# Altium PCB PCB1.PcbDoc (part 2 of 2)
Units mm, origin at the board's own origin, x right, y up, seen from the top; angles counter-clockwise.
Board outline 51.6 x 51.6 mm, 4 copper layers (Top Layer, Internal Plane 1, Signal Layer 1, Bottom Layer), stack 0.98 mm thick; 99 components, 76 nets, 363 pads, 363 vias.
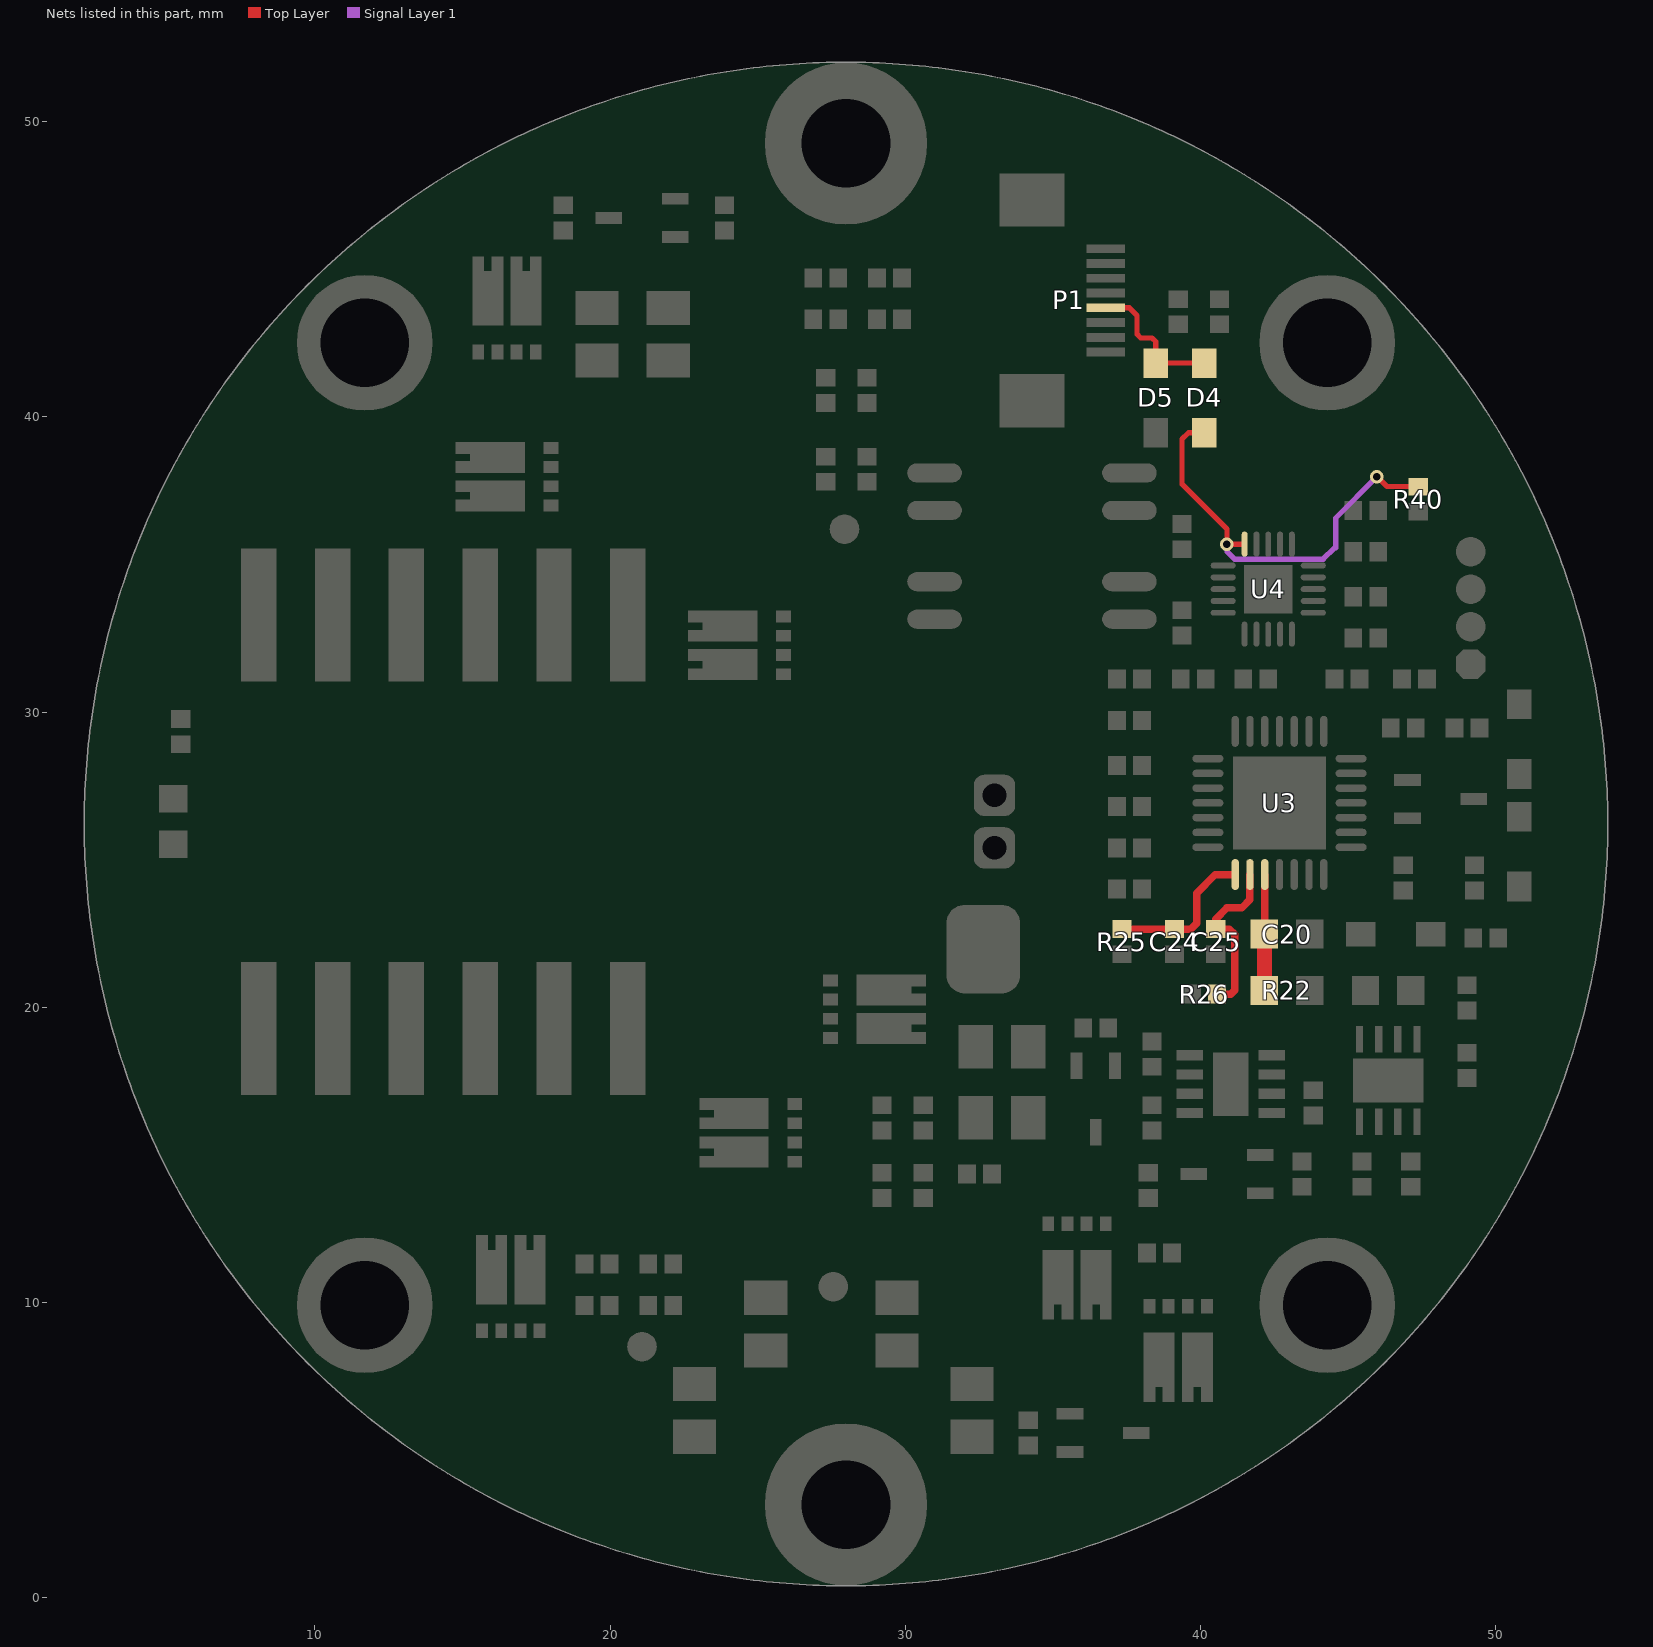
[diagram p4: the nets of this part, all layers, seen from the top]

## Via types
v1: diameter 0.457, hole 0.254, Top Layer to Bottom Layer, tented both sides, 363 vias

## Nets (pads, with @x,y where several pads share a name; then routed paths per layer and width w, separated by ;. In a path a pad name is that pad's centre, name@x,y a point inside that pad or via, vN(x,y) a via of type N, cw(c..) or ccw(c..) an arc to the next point about the centre after c; other vN are vias at no path point) (continued)
VC4: C24.2 R25.2 U3.15 | length 4.8
  Top Layer w0.254: 37.719,22.65 C24.2@39.116,22.65 39.668,22.65 39.87,22.852 39.87,23.868 40.501,24.499 U3.15@41.172,24.499
VC5: C25.2 R26.2 U3.16 | length 5.9
  Top Layer w0.254: R26.2@40.557,20.447 41.021,20.447 41.155,20.581 41.155,22.472 40.977,22.65 C25.2@40.513,22.65 40.513,22.987 40.894,23.368 41.402,23.368 41.672,23.638 U3.16@41.672,24.499
VDD: C20.2 R22.2 U3.17 | length 3.9
  Top Layer w0.254: C20.2@42.156,22.479 42.172,22.495 U3.17@42.172,24.499
  Top Layer w0.508: R22.2@42.156,20.574 C20.2@42.156,22.479
VINOK: D4.1 R40.1 U4.10 | length 14.4
  Top Layer w0.178: D4.1@40.132,39.46 39.587,39.46 39.37,39.243 39.37,37.719 40.894,36.195 v1(40.894,35.687) U4.10@41.491,35.688 U4.10@41.491,35.688 ; v1(45.974,37.973) 46.311,37.636 R40.1@47.371,37.636
  Signal Layer 1 w0.178: v1(40.894,35.687) 40.894,35.433 41.148,35.179 44.15,35.179 44.531,35.56 44.577,35.56 44.577,36.576 v1(45.974,37.973)
VINOKN: D4.2 D5.2 P1.5 | length 4.9
  Top Layer w0.178: P1.5@36.787,43.692 37.592,43.692 37.592,43.688 37.846,43.434 37.846,42.799 37.973,42.672 38.354,42.672 38.481,42.545 D5.2@38.481,41.82 D4.2@40.132,41.82
pads on no net: U1.3 U1.6 U1.7 U3.5 U3.6 U3.18 U3.19 U3.20 U3.21 U3.22 U3.23 U3.24 U3.28 U4.8 U4.12 U4.13 U4.16 U4.17

## Polygon pours and split planes (outlines as drawn)
GND on Top Layer "Component Side-No Net 1" (solid, remove dead copper, pour order 95): 31.877,43.18 31.889,43.192 35.56,43.192 35.56,43.074 36.074,42.56 36.445,42.189 36.445,38.326 32.54,38.326 32.385,38.481
GND on Top Layer "Component Side-No Net 1" (solid, remove dead copper, pour order 88): 3.81,23.876 2.286,11.811 9.652,10.922 10.795,11.303 14.224,8.001 25.908,-3.683 38.608,-3.683 53.34,-3.683 62.357,5.334 61.468,6.223 61.468,46.228 58.801,46.228 41.021,64.008 33.655,56.642 1.524,56.642
GND on Top Layer "Component Side-No Net 1" (solid, remove dead copper, pour order 164): 51.435,30.734 51.439,30.73 51.439,22.931 46.919,22.931 46.736,23.114 46.99,23.368 47.879,23.368 47.879,27.051 47.752,27.178 47.371,27.178 47.371,28.448 47.625,28.702 47.879,28.956 47.879,30.226 48.514,30.226 48.895,30.607
12V6 on Top Layer "Component Side-No Net 1" (solid, remove dead copper, pour order 162): 16.002,43.307 16.48,42.829 18.445,42.829 18.445,47.909 18.923,48.387 18.288,47.752 15.113,47.752
NetQ7_1 on Top Layer "Component Side-No Net 1" (solid, remove dead copper, pour order 83): 14.605,42.799 18.415,42.799 18.669,42.545 18.542,42.418 18.542,39.37 14.351,39.37 14.097,39.624
NetQ4_1 on Top Layer "Component Side-No Net 1" (solid, remove dead copper, pour order 159): 36.068,12.065 33.02,12.065 33.02,14.732 33.274,14.986 33.401,15.113 35.306,15.113
7V4 on Top Layer "Component Side-No Net 1" (solid, remove dead copper, pour order 158): 34.163,11.176 34.036,11.176 33.528,10.922 33.528,11.938 33.528,13.843 27.94,13.843 27.559,13.462 27.686,13.335 27.686,9.779 33.528,9.779 33.782,9.525
12V6 on Top Layer "Component Side-No Net 1" (solid, remove dead copper, pour order 157): 26.802,33.233 36.617,33.233 37.465,32.385 36.83,31.75 36.83,19.939 36.83,15.621 36.068,14.859 35.941,14.986 33.274,14.986 33.274,19.558 32.639,20.193 32.512,20.066 28.702,20.066
12V6 on Top Layer "Component Side-No Net 1" (solid, remove dead copper, pour order 144): 32.004,30.353 24.765,30.353 24.384,30.734 24.384,33.655 28.448,33.655 28.956,33.147 29.083,33.02 30.988,33.02
DRVCC on Top Layer "Component Side-No Net 1" (solid, remove dead copper, pour order 141): 41.783,16.637 44.45,16.637 44.45,15.367 41.783,15.367
DRVCC on Top Layer "Component Side-No Net 1" (solid, remove dead copper, pour order 140): 45.212,19.939 44.45,19.939 44.45,21.209 44.577,21.209 46.101,21.209
DRVCC on Top Layer "Component Side-No Net 1" (solid, remove dead copper, pour order 139): 45.085,18.415 45.593,18.415 45.593,19.558 46.101,19.558 46.101,21.209 45.085,21.209
GND on Top Layer "Component Side-No Net 1" (solid, remove dead copper, pour order 138): 46.609,21.209 48.514,21.209 48.514,19.939 46.609,19.939
CELL2H on Top Layer "Component Side-No Net 1" (solid, remove dead copper, pour order 135): 23.749,23.749 23.749,24.892 23.622,25.019 23.622,25.4 21.463,25.4 21.209,25.146 20.701,25.654 17.018,25.654 15.748,25.654 15.113,25.019 15.113,19.177 16.129,19.177 16.256,19.05 17.018,19.812 17.018,22.225 23.749,22.225
CELL4H on Top Layer "Component Side-No Net 1" (solid, remove dead copper, pour order 133): 18.796,36.576 18.796,30.353 19.177,29.972 19.543,30.338 25.094,30.338 25.094,36.397 25.019,36.576
CELL4L on Top Layer "Component Side-No Net 1" (solid, remove dead copper, pour order 132): 13.843,35.814 13.843,25.781 14.224,25.4 14.478,25.146 23.368,25.146 23.368,27.94 23.876,28.448 25.39,29.962 25.39,30.364 25.39,32.014 25.273,32.131 22.352,32.131 22.098,31.877 22.098,30.734 21.844,30.48 21.59,30.226 18.034,30.226 16.764,30.226 16.51,30.48 16.637,30.607 16.637,35.814
12V6 on Top Layer "Component Side-No Net 1" (solid, remove dead copper, pour order 131): 25.273,37.211 25.273,30.099 25.4,30.226 26.67,30.226 27.305,30.226 27.432,30.353 27.432,34.925
16V8 on Top Layer "Component Side-No Net 1" (solid, remove dead copper, pour order 129): 28.162,19.961 28.266,20.066 33.274,20.066 33.274,15.367 31.496,15.367 31.496,17.018 31.369,17.145 28.448,17.145 28.194,17.399
12V6 on Top Layer "Component Side-No Net 1" (solid, remove dead copper, pour order 122): 22.847,45.695 24.536,45.695 25.4,44.831 26.543,43.688 26.543,39.243 26.67,37.211 28.194,37.211 29.337,37.211 29.337,33.02 30.734,30.607 30.48,30.861 28.194,30.861 25.908,30.861 25.781,30.988 25.781,36.068 25.273,36.576 22.987,36.576 22.987,37.846 21.082,39.751
NetQ10_1 on Top Layer "Component Side-No Net 1" (solid, remove dead copper, pour order 121): 28.057,21.6 28.321,21.336 28.321,17.399 25.594,17.399 25.4,17.593 25.4,21.537
12V6 on Top Layer "Component Side-No Net 1" (solid, remove dead copper, pour order 120): 9.398,31.115 9.525,30.988 12.319,30.988 12.319,37.906 12.174,38.051 9.73,38.051 9.398,37.719
12V6 on Top Layer "Component Side-No Net 1" (solid, remove dead copper, pour order 118): 16.383,45.901 23.06,45.901 23.114,45.847 23.077,45.81 23.077,42.635 16.674,42.635 16.383,42.926
7V4 on Top Layer "Component Side-No Net 1" (solid, remove dead copper, pour order 116): 17.526,36.576 17.526,40.513 17.944,40.513 18.161,40.73 18.161,42.635 23.077,42.635 23.114,42.672 23.114,36.576
CELL3H on Top Layer "Component Side-No Net 1" (solid, remove dead copper, pour order 115): 17.145,37.846 17.145,35.814 14.224,35.814 13.843,35.814 13.843,31.369 13.843,30.988 12.319,30.988 12.319,37.973 17.018,37.973 17.145,38.1
CELL3L on Top Layer "Component Side-No Net 1" (solid, remove dead copper, pour order 114): 17.145,38.1 9.779,38.1 9.398,37.719 9.398,34.036 9.398,31.115 9.144,30.861 4.699,30.861 4.445,30.861 4.572,30.988 4.572,31.623 4.572,36.068 7.112,38.608 6.604,39.116 6.604,39.751 6.604,39.878 7.493,40.767 7.549,40.711 9.271,40.711 12.883,40.711 14.224,39.37 17.145,39.37
NetQ7_1 on Top Layer "Component Side-No Net 1" (solid, remove dead copper, pour order 113): 14.859,42.799 14.986,42.926 18.161,42.926 18.161,40.64 14.605,40.64
CELL3 on Top Layer "Component Side-No Net 1" (solid, remove dead copper, pour order 112): 16.383,42.926 16.383,47.117 16.256,46.99 15.875,46.99 15.113,46.99 13.081,44.958 9.271,41.148 9.271,40.894 9.271,40.132 10.033,39.37 13.97,39.37 14.224,39.37 14.605,39.751 14.859,40.005 14.859,42.037 14.859,42.799 14.986,42.926
7V4 on Top Layer "Component Side-No Net 1" (solid, remove dead copper, pour order 110): 21.336,12.446 22.733,12.446 22.86,12.573 22.86,8.763 25.781,8.763 26.035,9.017 26.289,9.271 26.289,11.684 25.146,11.684 23.749,13.081
NetQ4_1 on Top Layer "Component Side-No Net 1" (solid, remove dead copper, pour order 108): 34.29,12.192 34.29,14.986 37.465,14.986 37.465,11.938 34.29,11.938
3V7 on Top Layer "Component Side-No Net 1" (solid, remove dead copper, pour order 105): 25.4,17.399 28.448,17.399 28.448,11.938 26.67,11.938 25.4,13.208
CELL2H on Top Layer "Component Side-No Net 1" (solid, remove dead copper, pour order 104): 25.4,15.875 22.352,15.875 21.59,16.637 21.463,16.764 21.463,21.463 21.336,21.59 17.399,21.59 17.399,16.637 17.272,16.764 14.224,16.764 14.097,16.891 14.097,25.146 22.733,25.146 23.622,24.257 25.4,22.479 25.4,18.161
7V4 on Top Layer "Component Side-No Net 1" (solid, remove dead copper, pour order 103): 25.4,12.954 25.4,13.97 25.273,14.097 23.495,14.097 23.495,11.684 24.003,11.176 25.146,10.033 25.908,10.033
CELL2L on Top Layer "Component Side-No Net 1" (solid, remove dead copper, pour order 102): 25.4,15.621 22.352,15.621 21.59,16.383 21.463,16.51 21.463,18.542 21.463,21.463 21.336,21.59 19.811,21.59 19.811,14.987 20.828,13.97 25.4,13.97
7V4 on Top Layer "Component Side-No Net 1" (solid, remove dead copper, pour order 101): 17.399,21.59 17.399,17.145 17.78,16.764 18.161,16.383 18.161,12.065 18.288,11.938 22.987,11.938 23.241,11.938 23.622,11.557 23.622,9.144 35.814,9.144 35.814,9.779 35.814,11.684 35.941,11.811 34.29,11.811 26.797,11.811 26.162,12.446 24.638,13.97 21.717,13.97 20.828,13.97 20.32,14.478 19.939,14.859 19.939,21.59
CELL2 on Top Layer "Component Side-No Net 1" (solid, remove dead copper, pour order 99): 35.941,11.811 37.719,11.811 37.719,9.398 35.941,9.398
3V7 on Top Layer "Component Side-No Net 1" (solid, remove dead copper, pour order 92): 9.398,24.892 9.398,16.129 10.414,15.113 11.938,15.113 11.938,25.019 11.684,25.273 9.398,25.273
CELL1L on Top Layer "Component Side-No Net 1" (solid, remove dead copper, pour order 90): 11.938,21.971 11.938,15.367 11.938,15.24 12.065,15.113 16.129,15.113 16.51,14.732 16.51,9.906 18.288,9.906 18.161,10.033 18.161,15.621 18.161,16.383 17.78,16.764 14.478,16.764 14.224,16.764 14.097,16.891 14.097,21.971
CELL1H on Top Layer "Component Side-No Net 1" (solid, remove dead copper, pour order 89): 7.112,21.971 9.398,21.971 9.398,16.002 10.16,15.24 10.287,15.113 15.748,15.113 16.129,15.113 16.383,14.859 16.51,14.732 16.51,9.906 14.737,9.906 14.732,12.319 14.351,12.7 14.224,12.827 9.652,12.827 9.525,12.827 9.271,12.827 8.382,13.716 8.382,13.843 8.382,15.24 7.112,16.51
GND on Top Layer "Component Side-No Net 1" (solid, remove dead copper, pour order 87): 9.017,11.557 9.017,11.43 13.335,7.112 18.034,2.413 25.273,2.413 32.893,2.413 33.401,2.921 33.274,3.048 33.274,6.35 18.415,6.35 18.288,6.35 18.288,6.731 18.288,9.271 18.288,9.525 15.113,9.525 14.859,9.525 14.732,9.652 14.732,11.938 14.732,12.319 14.351,12.7 9.398,12.7 9.017,12.319
3V7 on Top Layer "Component Side-No Net 1" (solid, remove dead copper, pour order 86): 39.116,9.144 39.116,6.604 38.862,6.35 38.735,6.223 37.211,6.223 36.449,6.223 36.068,6.604 34.417,6.604 18.542,6.604 18.542,9.144
NetQ1_1 on Top Layer "Component Side-No Net 1" (solid, remove dead copper, pour order 85): 38.608,9.398 40.513,9.398 40.55,9.435 40.767,9.652 40.767,11.91 40.767,12.319 38.608,12.319
CELL1 on Top Layer "Component Side-No Net 1" (solid, remove dead copper, pour order 84): 41.783,6.604 44.069,8.89 44.831,8.89 44.831,9.271 46.863,11.303 46.863,12.573 46.228,13.208 42.418,13.208 41.656,13.208 40.767,12.319 40.767,9.652 40.386,9.271 39.497,9.271 39.37,9.271 39.37,6.604
CELL4 on Top Layer "Component Side-No Net 1" (solid, remove dead copper, pour order 124): 28.321,20.066 28.194,20.193 28.194,22.479 28.829,22.479 29.083,22.733 29.718,22.733 29.972,22.733 30.734,23.495 30.861,23.622 34.29,23.622 34.29,19.939 34.163,19.812
CELL4L on Top Layer "Component Side-No Net 1" (solid, remove dead copper, pour order 126): 21.336,25.4 24.384,25.4 25.146,25.4 25.654,25.908 25.781,26.035 25.781,29.337 25.781,29.651 25.094,30.338 24.063,31.608 22.352,30.226
CELL2H on Top Layer "Component Side-No Net 1" (solid, remove dead copper, pour order 127): 19.304,25.273 24.13,25.273 24.511,24.892 25.4,24.003 25.4,21.784 25.4,20.066 14.605,18.288
12V6 on Top Layer "Component Side-No Net 1" (solid, remove dead copper, pour order 128): 33.76,27.918 33.229,28.448 30.48,25.019 24.003,28.448 24.003,34.163 24.638,34.798 25.527,33.909 28.194,33.909 28.448,33.909 30.988,31.369 31.242,31.115 34.036,31.115
CELL4 on Top Layer "Component Side-No Net 1" (solid, remove dead copper, pour order 123): 28.127,20.691 28.067,20.751 28.067,24.638 35.433,24.638 35.56,24.511 35.56,20.32 32.545,20.32 32.317,20.092 32.186,19.961 28.162,19.961
NetQ10_1 on Top Layer "Component Side-No Net 1" (solid, remove dead copper, pour order 125): 24.384,17.399 28.448,17.399 28.585,17.536 29.21,18.161 29.21,25.781 25.019,25.781 24.765,25.527
GND on Bottom Layer "Component Side-No Net 1" (solid, remove dead copper, pour order 97): 8.636,12.065 13.589,7.112 13.589,6.985 16.383,6.985 16.637,7.239 16.891,7.493 16.891,13.335 9.779,13.335 8.382,14.732
GND on Bottom Layer "Component Side-No Net 1" (solid, remove dead copper, pour order 91): 8.763,11.557 9.652,11.557 15.494,5.715 25.019,-3.81 35.687,-3.81 51.308,-3.81 55.499,0.381 60.452,5.334 60.452,12.065 60.452,37.592 58.42,39.624 47.117,50.927 47.117,56.769 12.573,56.769 12.065,56.261 -0.889,43.307 -3.937,43.307 -3.937,24.511 -6.477,21.971
GND on Bottom Layer "Component Side-No Net 1" (solid, remove dead copper, pour order 163): 51.689,44.45 43.815,44.45 40.64,41.275 39.333,39.968 39.333,34.022 53.608,34.022 54.102,33.528
CELL2 on Bottom Layer "Component Side-No Net 1" (solid, pour order 152): 34.417,41.91 41.021,41.91 45.339,43.434 45.212,40.132 41.91,37.465 36.068,37.465 35.814,37.211
12V6 on Bottom Layer "Component Side-No Net 1" (solid, remove dead copper, pour order 151): 17.272,43.942 17.653,43.561 22.987,43.561 22.987,46.609 22.479,47.117 21.765,46.403 16.177,46.403
CELL2 on Bottom Layer "Component Side-No Net 1" (solid, remove dead copper, pour order 150): 19.149,41.395 29.33,41.395 29.337,41.402 28.194,42.545 28.194,45.593 22.937,45.593 22.823,45.706
16V8 on Bottom Layer "Component Side-No Net 1" (solid, remove dead copper, pour order 149): 15.875,36.068 16.002,35.941 18.288,35.941 18.288,29.718 18.034,29.972 14.097,29.972
7V4 on Bottom Layer "Component Side-No Net 1" (solid, remove dead copper, pour order 148): 20.447,29.591 21.082,26.416 26.903,30.266 27.813,26.797 29.972,32.385 30.607,33.02 30.607,40.386 19.939,40.386 19.558,40.005
16V8 on Bottom Layer "Component Side-No Net 1" (solid, remove dead copper, pour order 147): 21.209,23.749 35.56,23.749 37.084,22.225 41.529,17.78 41.529,10.795 21.488,10.795 20.32,9.627
7V4 on Bottom Layer "Component Side-No Net 1" (solid, remove dead copper, pour order 146): 34.544,9.144 34.544,11.363 34.096,11.811 33.715,12.192 26.162,12.192 26.162,21.717 25.654,22.225 23.749,24.13 23.368,24.13 21.082,24.13 20.32,23.368 20.32,8.89
3V7 on Bottom Layer "Component Side-No Net 1" (solid, remove dead copper, pour order 145): 26.289,17.653 29.026,17.653 29.21,17.837 29.908,17.139 29.908,16.681 29.908,12.763 29.867,12.722 29.553,12.408 26.708,12.408 26.289,12.827
DRVCC on Bottom Layer "Component Side-No Net 1" (solid, remove dead copper, pour order 142): 45.593,20.955 45.593,18.669 45.085,18.161 45.085,15.367 42.545,15.367 42.545,16.256 44.069,16.256 44.196,16.383 44.196,16.637 44.196,19.431 44.45,19.685 44.45,19.939 44.45,20.955
16V8 on Bottom Layer "Component Side-No Net 1" (solid, remove dead copper, pour order 137): 29.21,18.964 29.21,17.38 29.908,16.681 29.953,16.637 32.766,16.637 32.766,19.812 32.512,20.066 30.734,20.066
7V4 on Bottom Layer "Component Side-No Net 1" (solid, remove dead copper, pour order 136): 34.096,11.605 34.29,11.799 34.29,11.811 32.639,11.811 32.004,11.176 32.004,10.16
CELL3 on Bottom Layer "Component Side-No Net 1" (solid, remove dead copper, pour order 134): 9.144,41.148 9.144,40.386 9.144,40.259 10.033,39.37 13.208,39.37 13.589,39.37 14.224,40.005 14.478,40.259 14.478,45.974 14.224,45.974 13.081,44.831 12.954,44.831
7V4 on Bottom Layer "Component Side-No Net 1" (solid, remove dead copper, pour order 117): 23.622,35.433 23.622,40.513 19.304,40.513 19.177,40.64 19.431,40.386 19.431,35.052
7V4 on Bottom Layer "Component Side-No Net 1" (solid, remove dead copper, pour order 111): 34.29,11.811 34.163,11.684 26.797,11.684 26.67,11.684 25.654,12.7 25.527,12.827 25.527,16.383 25.527,17.145 24.13,18.542 23.622,19.05 23.622,25.146 23.622,37.211 20.828,37.211 20.828,17.272 22.225,15.875 22.86,15.24 22.86,14.605 22.86,9.271 34.29,9.271
CELL2 on Bottom Layer "Component Side-No Net 1" (solid, remove dead copper, pour order 109): 21.971,9.144 34.163,9.144 34.29,9.271 34.29,11.811 35.941,11.811 36.957,8.763 35.052,8.128 34.544,7.62 21.463,7.62
3V7 on Bottom Layer "Component Side-No Net 1" (solid, remove dead copper, pour order 107): 28.448,17.653 28.448,12.408 26.708,12.408 26.289,12.827 26.289,14.986 26.416,14.986 26.797,15.367 26.756,15.408 26.756,17.231 27.178,17.653
CELL2 on Bottom Layer "Component Side-No Net 1" (solid, remove dead copper, pour order 98): 21.082,6.477 29.972,6.477 36.195,6.477 36.957,7.239 37.465,7.747 37.465,11.811 35.941,11.811 35.941,9.652 35.941,9.017 35.56,8.636 35.052,8.128 20.574,8.128 20.574,6.477
CELL2 on Bottom Layer "Component Side-No Net 1" (solid, pour order 96): 19.304,13.716 19.304,13.462 20.193,12.573 20.574,12.192 20.574,6.477 22.479,6.477 22.606,6.604 22.733,6.731 22.733,15.113 22.352,15.494
CELL2 on Bottom Layer "Component Side-No Net 1" (solid, remove dead copper, pour order 94): 47.752,39.878 47.752,40.005 44.45,43.053 42.672,43.053 29.972,43.053 21.082,43.053 17.907,39.878 17.907,15.113 20.193,12.827 22.479,15.113 22.479,15.367 22.352,15.494 20.701,17.145 20.701,21.59 20.701,37.973 21.209,38.481 22.479,39.751 47.752,39.751
3V7 on Bottom Layer "Component Side-No Net 1" (solid, remove dead copper, pour order 93): 9.398,25.4 11.811,25.4 11.811,25.273 11.811,25.146 11.811,15.367 12.065,15.113 16.256,15.113 17.653,15.113 18.161,14.605 20.32,12.446 20.32,6.604 18.542,6.604 18.542,11.684 18.542,11.938 18.161,12.319 17.907,12.573 15.494,12.573 10.414,12.573 9.398,13.589
GND on Signal Layer 1 "Component Side-No Net 1" (solid, remove dead copper, pour order 100): 4.572,56.388 6.985,53.975 50.8,53.975 50.8,48.006 57.023,41.783 56.388,41.148 56.388,15.24 56.388,4.699 53.086,1.397 48.26,-3.429 31.242,-3.429 1.651,-3.429 -2.54,0.762
7V4 on Signal Layer 1 "Component Side-No Net 1" (solid, remove dead copper, pour order 161): 30.607,9.398 35.687,9.398 36.068,9.017 36.537,9.486 36.537,13.282 32.332,13.282 31.369,12.319
CELL2 on Signal Layer 1 "Component Side-No Net 1" (solid, remove dead copper, pour order 160): 35.052,9.652 35.433,9.271 40.259,9.271 40.259,13.335 40.132,13.462 39.243,12.573 35.179,12.573
7V4 on Signal Layer 1 "Component Side-No Net 1" (solid, remove dead copper, pour order 156): 10.033,34.417 30.226,34.417 30.607,34.036 33.147,36.576 33.147,44.704 31.496,46.355 31.405,46.264 23.147,46.264 20.61,46.264 14.732,40.386
3V7 on Signal Layer 1 "Component Side-No Net 1" (solid, remove dead copper, pour order 155): 8.255,26.289 8.636,25.908 16.383,25.908 16.383,20.828 15.367,19.812 14.224,20.955 8.001,20.955
3V7 on Signal Layer 1 "Component Side-No Net 1" (solid, remove dead copper, pour order 154): 8.89,19.177 39.243,19.177 40.386,18.034 40.259,17.907 40.259,3.937 11.43,3.937 11.303,3.81
16V8 on Signal Layer 1 "Component Side-No Net 1" (solid, remove dead copper, pour order 153): 33.07,17.399 12.7,17.399 10.795,19.304 10.414,19.685 10.414,36.322 17.272,36.322 19.558,34.036 20.701,32.893 31.369,32.893
7V4 on Signal Layer 1 "Component Side-No Net 1" (solid, remove dead copper, pour order 143): 34.592,12.103 34.592,9.573 34.544,9.525 29.718,9.525 31.915,11.722 31.915,12.065
16V8 on Signal Layer 1 "Component Side-No Net 1" (solid, remove dead copper, pour order 130): 32.639,17.399 17.145,17.399 14.605,19.939 14.605,35.56 17.653,35.56 17.653,23.749 18.034,23.368 19.685,21.717 32.639,21.717
12V6 on Signal Layer 1 "Component Side-No Net 1" (solid, remove dead copper, pour order 119): 18.542,45.466 21.971,45.466 21.971,40.64 20.828,39.497 20.701,39.37 17.526,39.37 16.129,39.37 12.319,35.56 9.398,35.56 9.398,37.719 9.652,37.973 9.779,38.1 11.811,38.1 11.938,38.1 13.716,39.878 14.732,40.894 15.367,40.894 16.012,40.894 16.139,41.021 16.764,41.646 16.764,45.085 17.145,45.466
3V7 on Signal Layer 1 "Component Side-No Net 1" (solid, remove dead copper, pour order 106): 18.542,9.144 20.955,9.144 20.955,13.97 21.209,14.224 21.59,14.605 27.178,14.605 27.178,17.399 28.448,17.399 28.448,12.573 25.781,12.573 23.114,12.573 22.86,12.319 22.86,10.033 22.86,6.604 18.542,6.604
GND on Internal Plane 1 (split plane): 755 vertices, not listed, extent 2.69,0.908 53.292,51.51

## Keep-outs
Keep-Out Layer:
  circle w0.254: c42.768,38.64 r1.3
  circle w0.254: c11.692,9.911 r1.5
  circle w0.254: c44.29,9.911 r1.5
  circle w0.254: c44.29,42.508 r1.5
  circle w0.254: c27.99,26.209 r3.733
  lines w0.254: 2.191,26.209 ccw(c27.991,26.209) 2.195,25.759 ccw(c27.991,26.209) 2.206,25.309 ccw(c27.991,26.209) 2.226,24.859 ccw(c27.991,26.209) 2.254,24.41 ccw(c27.991,26.209) 2.289,23.961 ccw(c27.991,26.209) 2.332,23.513 ccw(c27.991,26.209) 2.383,23.065 ccw(c27.991,26.209) 2.442,22.619 ccw(c27.991,26.209) 2.508,22.173 ccw(c27.991,26.209) 2.583,21.729 ccw(c27.991,26.209) 2.665,21.286 ccw(c27.991,26.209) 2.754,20.845 ccw(c27.991,26.209) 2.852,20.406 ccw(c27.991,26.209) 2.957,19.968 ccw(c27.991,26.209) 3.07,19.532 ccw(c27.991,26.209) 3.19,19.098 ccw(c27.991,26.209) 3.318,18.666 ccw(c27.991,26.209) 3.453,18.237 ccw(c27.991,26.209) 3.596,17.81 ccw(c27.991,26.209) 3.747,17.385 ccw(c27.991,26.209) 3.904,16.963 ccw(c27.991,26.209) 4.069,16.544 ccw(c27.991,26.209) 4.242,16.128 ccw(c27.991,26.209) 4.421,15.716 ccw(c27.991,26.209) 4.608,15.306 ccw(c27.991,26.209) 4.802,14.899 ccw(c27.991,26.209) 5.003,14.496 ccw(c27.991,26.209) 5.211,14.097 ccw(c27.991,26.209) 5.425,13.701 ccw(c27.991,26.209) 5.647,13.309 ccw(c27.991,26.209) 5.876,12.921 ccw(c27.991,26.209) 6.111,12.537 ccw(c27.991,26.209) 6.353,12.158 ccw(c27.991,26.209) 6.602,11.782 ccw(c27.991,26.209) 6.857,11.411 ccw(c27.991,26.209) 7.118,11.044 ccw(c27.991,26.209) 7.386,10.683 ccw(c27.991,26.209) 7.66,10.325 ccw(c27.991,26.209) 7.94,9.973 ccw(c27.991,26.209) 8.227,9.625 ccw(c27.991,26.209) 8.519,9.283 ccw(c27.991,26.209) 8.818,8.946 ccw(c27.991,26.209) 9.122,8.614 ccw(c27.991,26.209) 9.432,8.287 ccw(c27.991,26.209) 9.747,7.966 ccw(c27.991,26.209) 10.069,7.65 ccw(c27.991,26.209) 10.395,7.34 ccw(c27.991,26.209) 10.727,7.036 ccw(c27.991,26.209) 11.064,6.738 ccw(c27.991,26.209) 11.407,6.445 ccw(c27.991,26.209) 11.754,6.159 ccw(c27.991,26.209) 12.107,5.879 ccw(c27.991,26.209) 12.464,5.605 ccw(c27.991,26.209) 12.826,5.337 ccw(c27.991,26.209) 13.192,5.075 ccw(c27.991,26.209) 13.564,4.82 ccw(c27.991,26.209) 13.939,4.572 ccw(c27.991,26.209) 14.319,4.33 ccw(c27.991,26.209) 14.703,4.094 ccw(c27.991,26.209) 15.091,3.866 ccw(c27.991,26.209) 15.483,3.644 ccw(c27.991,26.209) 15.878,3.429 ccw(c27.991,26.209) 16.278,3.221 ccw(c27.991,26.209) 16.681,3.02 ccw(c27.991,26.209) 17.087,2.827 ccw(c27.991,26.209) 17.497,2.64 ccw(c27.991,26.209) 17.91,2.46 ccw(c27.991,26.209) 18.326,2.288 ccw(c27.991,26.209) 18.745,2.123 ccw(c27.991,26.209) 19.167,1.965 ccw(c27.991,26.209) 19.591,1.815 ccw(c27.991,26.209) 20.018,1.672 ccw(c27.991,26.209) 20.448,1.537 ccw(c27.991,26.209) 20.879,1.409 ccw(c27.991,26.209) 21.313,1.288 ccw(c27.991,26.209) 21.749,1.176 ccw(c27.991,26.209) 22.187,1.071 ccw(c27.991,26.209) 22.627,0.973 ccw(c27.991,26.209) 23.068,0.883 ccw(c27.991,26.209) 23.511,0.801 ccw(c27.991,26.209) 23.955,0.727 ccw(c27.991,26.209) 24.4,0.66 ccw(c27.991,26.209) 24.846,0.602 ccw(c27.991,26.209) 25.294,0.551 ccw(c27.991,26.209) 25.742,0.508 ccw(c27.991,26.209) 26.191,0.472 ccw(c27.991,26.209) 26.64,0.445 ccw(c27.991,26.209) 27.09,0.425 ccw(c27.991,26.209) 27.54,0.413 ccw(c27.991,26.209) 27.991,0.409 ccw(c27.991,26.209) 28.441,0.413 ccw(c27.991,26.209) 28.891,0.425 ccw(c27.991,26.209) 29.341,0.445 ccw(c27.991,26.209) 29.79,0.472 ccw(c27.991,26.209) 30.239,0.508 ccw(c27.991,26.209) 30.688,0.551 ccw(c27.991,26.209) 31.135,0.602 ccw(c27.991,26.209) 31.581,0.66 ccw(c27.991,26.209) 32.027,0.727 ccw(c27.991,26.209) 32.471,0.801 ccw(c27.991,26.209) 32.914,0.883 ccw(c27.991,26.209) 33.355,0.973 ccw(c27.991,26.209) 33.794,1.071 ccw(c27.991,26.209) 34.232,1.176 ccw(c27.991,26.209) 34.668,1.288 ccw(c27.991,26.209) 35.102,1.409 ccw(c27.991,26.209) 35.534,1.537 ccw(c27.991,26.209) 35.963,1.672 ccw(c27.991,26.209) 36.39,1.815 ccw(c27.991,26.209) 36.815,1.965 ccw(c27.991,26.209) 37.237,2.123 ccw(c27.991,26.209) 37.656,2.288 ccw(c27.991,26.209) 38.072,2.46 ccw(c27.991,26.209) 38.485,2.64 ccw(c27.991,26.209) 38.894,2.827 ccw(c27.991,26.209) 39.301,3.02 ccw(c27.991,26.209) 39.704,3.221 ccw(c27.991,26.209) 40.103,3.429 ccw(c27.991,26.209) 40.499,3.644 ccw(c27.991,26.209) 40.891,3.866 ccw(c27.991,26.209) 41.279,4.094 ccw(c27.991,26.209) 41.663,4.33 ccw(c27.991,26.209) 42.042,4.572 ccw(c27.991,26.209) 42.418,4.82 ccw(c27.991,26.209) 42.789,5.075 ccw(c27.991,26.209) 43.156,5.337 ccw(c27.991,26.209) 43.518,5.605 ccw(c27.991,26.209) 43.875,5.879 ccw(c27.991,26.209) 44.227,6.159 ccw(c27.991,26.209) 44.575,6.445 ccw(c27.991,26.209) 44.917,6.738 ccw(c27.991,26.209) 45.254,7.036 ccw(c27.991,26.209) 45.586,7.34 ccw(c27.991,26.209) 45.913,7.65 ccw(c27.991,26.209) 46.234,7.966 ccw(c27.991,26.209) 46.55,8.287 ccw(c27.991,26.209) 46.86,8.614 ccw(c27.991,26.209) 47.164,8.946 ccw(c27.991,26.209) 47.462,9.283 ccw(c27.991,26.209) 47.755,9.625 ccw(c27.991,26.209) 48.041,9.973 ccw(c27.991,26.209) 48.321,10.325 ccw(c27.991,26.209) 48.596,10.683 ccw(c27.991,26.209) 48.863,11.044 ccw(c27.991,26.209) 49.125,11.411 ccw(c27.991,26.209) 49.38,11.782 ccw(c27.991,26.209) 49.628,12.158 ccw(c27.991,26.209) 49.87,12.537 ccw(c27.991,26.209) 50.106,12.921 ccw(c27.991,26.209) 50.334,13.309 ccw(c27.991,26.209) 50.556,13.701 ccw(c27.991,26.209) 50.771,14.097 ccw(c27.991,26.209) 50.979,14.496 ccw(c27.991,26.209) 51.18,14.899 ccw(c27.991,26.209) 51.373,15.306 ccw(c27.991,26.209) 51.56,15.716 ccw(c27.991,26.209) 51.74,16.128 ccw(c27.991,26.209) 51.912,16.544 ccw(c27.991,26.209) 52.077,16.963 ccw(c27.991,26.209) 52.235,17.385 ccw(c27.991,26.209) 52.385,17.81 ccw(c27.991,26.209) 52.528,18.237 ccw(c27.991,26.209) 52.663,18.666 ccw(c27.991,26.209) 52.791,19.098 ccw(c27.991,26.209) 52.912,19.532 ccw(c27.991,26.209) 53.024,19.968 ccw(c27.991,26.209) 53.129,20.406 ccw(c27.991,26.209) 53.227,20.845 ccw(c27.991,26.209) 53.317,21.286 ccw(c27.991,26.209) 53.399,21.729 ccw(c27.991,26.209) 53.473,22.173 ccw(c27.991,26.209) 53.54,22.619 ccw(c27.991,26.209) 53.598,23.065 ccw(c27.991,26.209) 53.649,23.513 ccw(c27.991,26.209) 53.693,23.961 ccw(c27.991,26.209) 53.728,24.41 ccw(c27.991,26.209) 53.755,24.859 ccw(c27.991,26.209) 53.775,25.309 ccw(c27.991,26.209) 53.787,25.759 ccw(c27.991,26.209) 53.791,26.209 ccw(c27.991,26.209) 53.787,26.66 ccw(c27.991,26.209) 53.775,27.11 ccw(c27.991,26.209) 53.755,27.56 ccw(c27.991,26.209) 53.728,28.009 ccw(c27.991,26.209) 53.693,28.458 ccw(c27.991,26.209) 53.649,28.906 ccw(c27.991,26.209) 53.598,29.354 ccw(c27.991,26.209) 53.54,29.8 ccw(c27.991,26.209) 53.473,30.245 ccw(c27.991,26.209) 53.399,30.689 ccw(c27.991,26.209) 53.317,31.132 ccw(c27.991,26.209) 53.227,31.573 ccw(c27.991,26.209) 53.129,32.013 ccw(c27.991,26.209) 53.024,32.451 ccw(c27.991,26.209) 52.912,32.887 ccw(c27.991,26.209) 52.791,33.321 ccw(c27.991,26.209) 52.663,33.753 ccw(c27.991,26.209) 52.528,34.182 ccw(c27.991,26.209) 52.385,34.609 ccw(c27.991,26.209) 52.235,35.033 ccw(c27.991,26.209) 52.077,35.455 ccw(c27.991,26.209) 51.912,35.874 ccw(c27.991,26.209) 51.74,36.29 ccw(c27.991,26.209) 51.56,36.703 ccw(c27.991,26.209) 51.373,37.113 ccw(c27.991,26.209) 51.18,37.519 ccw(c27.991,26.209) 50.979,37.922 ccw(c27.991,26.209) 50.771,38.322 ccw(c27.991,26.209) 50.556,38.717 ccw(c27.991,26.209) 50.334,39.109 ccw(c27.991,26.209) 50.106,39.497 ccw(c27.991,26.209) 49.87,39.881 ccw(c27.991,26.209) 49.628,40.261 ccw(c27.991,26.209) 49.38,40.637 ccw(c27.991,26.209) 49.125,41.008 ccw(c27.991,26.209) 48.863,41.374 ccw(c27.991,26.209) 48.596,41.736 ccw(c27.991,26.209) 48.321,42.093 ccw(c27.991,26.209) 48.041,42.446 ccw(c27.991,26.209) 47.755,42.793 ccw(c27.991,26.209) 47.462,43.136 ccw(c27.991,26.209) 47.164,43.473 ccw(c27.991,26.209) 46.86,43.805 ccw(c27.991,26.209) 46.55,44.132 ccw(c27.991,26.209) 46.234,44.453 ccw(c27.991,26.209) 45.913,44.768 ccw(c27.991,26.209) 45.586,45.078 ccw(c27.991,26.209) 45.254,45.382 ccw(c27.991,26.209) 44.917,45.681 ccw(c27.991,26.209) 44.575,45.973 ccw(c27.991,26.209) 44.227,46.26 ccw(c27.991,26.209) 43.875,46.54 ccw(c27.991,26.209) 43.518,46.814 ccw(c27.991,26.209) 43.156,47.082 ccw(c27.991,26.209) 42.789,47.343 ccw(c27.991,26.209) 42.418,47.599 ccw(c27.991,26.209) 42.042,47.847 ccw(c27.991,26.209) 41.663,48.089 ccw(c27.991,26.209) 41.279,48.324 ccw(c27.991,26.209) 40.891,48.553 ccw(c27.991,26.209) 40.499,48.775 ccw(c27.991,26.209) 40.103,48.989 ccw(c27.991,26.209) 39.704,49.197 ccw(c27.991,26.209) 39.301,49.398 ccw(c27.991,26.209) 38.894,49.592 ccw(c27.991,26.209) 38.485,49.779 ccw(c27.991,26.209) 38.072,49.958 ccw(c27.991,26.209) 37.656,50.131 ccw(c27.991,26.209) 37.237,50.296 ccw(c27.991,26.209) 36.815,50.453 ccw(c27.991,26.209) 36.39,50.604 ccw(c27.991,26.209) 35.963,50.747 ccw(c27.991,26.209) 35.534,50.882 ccw(c27.991,26.209) 35.102,51.01 ccw(c27.991,26.209) 34.668,51.13 ccw(c27.991,26.209) 34.232,51.243 ccw(c27.991,26.209) 33.794,51.348 ccw(c27.991,26.209) 33.355,51.446 ccw(c27.991,26.209) 32.914,51.535 ccw(c27.991,26.209) 32.471,51.617 ccw(c27.991,26.209) 32.027,51.692 ccw(c27.991,26.209) 31.581,51.758 ccw(c27.991,26.209) 31.135,51.817 ccw(c27.991,26.209) 30.688,51.868 ccw(c27.991,26.209) 30.239,51.911 ccw(c27.991,26.209) 29.79,51.947 ccw(c27.991,26.209) 29.341,51.974 ccw(c27.991,26.209) 28.891,51.994 ccw(c27.991,26.209) 28.441,52.005 ccw(c27.991,26.209) 27.991,52.009 ccw(c27.991,26.209) 27.54,52.005 ccw(c27.991,26.209) 27.09,51.994 ccw(c27.991,26.209) 26.64,51.974 ccw(c27.991,26.209) 26.191,51.947 ccw(c27.991,26.209) 25.742,51.911 ccw(c27.991,26.209) 25.294,51.868 ccw(c27.991,26.209) 24.846,51.817 ccw(c27.991,26.209) 24.4,51.758 ccw(c27.991,26.209) 23.955,51.692 ccw(c27.991,26.209) 23.511,51.617 ccw(c27.991,26.209) 23.068,51.535 ccw(c27.991,26.209) 22.627,51.446 ccw(c27.991,26.209) 22.187,51.348 ccw(c27.991,26.209) 21.749,51.243 ccw(c27.991,26.209) 21.313,51.13 ccw(c27.991,26.209) 20.879,51.01 ccw(c27.991,26.209) 20.448,50.882 ccw(c27.991,26.209) 20.018,50.747 ccw(c27.991,26.209) 19.591,50.604 ccw(c27.991,26.209) 19.167,50.453 ccw(c27.991,26.209) 18.745,50.296 ccw(c27.991,26.209) 18.326,50.131 ccw(c27.991,26.209) 17.91,49.958 ccw(c27.991,26.209) 17.497,49.779 ccw(c27.991,26.209) 17.087,49.592 ccw(c27.991,26.209) 16.681,49.398 ccw(c27.991,26.209) 16.278,49.197 ccw(c27.991,26.209) 15.878,48.989 ccw(c27.991,26.209) 15.483,48.775 ccw(c27.991,26.209) 15.091,48.553 ccw(c27.991,26.209) 14.703,48.324 ccw(c27.991,26.209) 14.319,48.089 ccw(c27.991,26.209) 13.939,47.847 ccw(c27.991,26.209) 13.564,47.599 ccw(c27.991,26.209) 13.192,47.343 ccw(c27.991,26.209) 12.826,47.082 ccw(c27.991,26.209) 12.464,46.814 ccw(c27.991,26.209) 12.107,46.54 ccw(c27.991,26.209) 11.754,46.26 ccw(c27.991,26.209) 11.407,45.973 ccw(c27.991,26.209) 11.064,45.681 ccw(c27.991,26.209) 10.727,45.382 ccw(c27.991,26.209) 10.395,45.078 ccw(c27.991,26.209) 10.069,44.768 ccw(c27.991,26.209) 9.747,44.453 ccw(c27.991,26.209) 9.432,44.132 ccw(c27.991,26.209) 9.122,43.805 ccw(c27.991,26.209) 8.818,43.473 ccw(c27.991,26.209) 8.519,43.136 ccw(c27.991,26.209) 8.227,42.793 ccw(c27.991,26.209) 7.94,42.446 ccw(c27.991,26.209) 7.66,42.093 ccw(c27.991,26.209) 7.386,41.736 ccw(c27.991,26.209) 7.118,41.374 ccw(c27.991,26.209) 6.857,41.008 ccw(c27.991,26.209) 6.602,40.637 ccw(c27.991,26.209) 6.353,40.261 ccw(c27.991,26.209) 6.111,39.881 ccw(c27.991,26.209) 5.876,39.497 ccw(c27.991,26.209) 5.647,39.109 ccw(c27.991,26.209) 5.425,38.717 ccw(c27.991,26.209) 5.211,38.322 ccw(c27.991,26.209) 5.003,37.922 ccw(c27.991,26.209) 4.802,37.519 ccw(c27.991,26.209) 4.608,37.113 ccw(c27.991,26.209) 4.421,36.703 ccw(c27.991,26.209) 4.242,36.29 ccw(c27.991,26.209) 4.069,35.874 ccw(c27.991,26.209) 3.904,35.455 ccw(c27.991,26.209) 3.747,35.033 ccw(c27.991,26.209) 3.596,34.609 ccw(c27.991,26.209) 3.453,34.182 ccw(c27.991,26.209) 3.318,33.753 ccw(c27.991,26.209) 3.19,33.321 ccw(c27.991,26.209) 3.07,32.887 ccw(c27.991,26.209) 2.957,32.451 ccw(c27.991,26.209) 2.852,32.013 ccw(c27.991,26.209) 2.754,31.573 ccw(c27.991,26.209) 2.665,31.132 ccw(c27.991,26.209) 2.583,30.689 ccw(c27.991,26.209) 2.508,30.245 ccw(c27.991,26.209) 2.442,29.8 ccw(c27.991,26.209) 2.383,29.354 ccw(c27.991,26.209) 2.332,28.906 ccw(c27.991,26.209) 2.289,28.458 ccw(c27.991,26.209) 2.254,28.009 ccw(c27.991,26.209) 2.226,27.56 ccw(c27.991,26.209) 2.206,27.11 ccw(c27.991,26.209) 2.195,26.66 ccw(c27.991,26.209) 2.191,26.209

## Other copper
Top Layer:
  rectangle net GND: 33.401,44.958 35.306,48.641
  rectangle net 16V8: 16.637,30.226 18.796,35.56
Bottom Layer:
  rectangle net 12V6: 9.604,35.512 11.732,37.64

## Silkscreen, mask and mechanical layers (free items; w line width, h text height)
Top Overlay:
  circle w0.254: c27.99,26.209 r24
  region: 9.652,29.083 9.271,29.083 9.271,28.702 9.652,28.702
  region: 12.827,29.083 12.446,29.083 12.446,28.702 12.827,28.702
  region: 17.272,29.083 16.891,29.083 16.891,28.702 17.272,28.702
  region: 20.447,29.083 20.066,29.083 20.066,28.702 20.447,28.702
  rectangle: 19.05,23.368 19.431,23.749
  rectangle: 15.875,23.368 16.256,23.749
  rectangle: 8.382,23.368 8.763,23.749
  rectangle: 11.557,23.368 11.938,23.749
  rectangle: 44.323,15.24 44.704,15.621
  rectangle: 39.243,19.431 39.497,19.685
  lines w0.254: 7.874,24.892 20.955,24.892 ; 8.001,27.559 20.955,27.559 ; 8.001,29.845 8.001,28.448 ccw(c8.509,28.448) 9.017,28.448 ccw(c9.525,28.448) 10.033,28.448 ; 8.128,22.606 8.128,24.003 cw(c8.636,24.003) 9.144,24.003 cw(c9.652,24.003) 10.16,24.003 cw(c10.668,24.003) 11.176,24.003 ; 10.033,29.845 10.033,28.448 ; 11.176,22.606 11.176,24.003 ; 13.081,29.845 13.081,28.448 cw(c12.573,28.448) 12.065,28.448 cw(c11.557,28.448) 11.049,28.448 cw(c10.541,28.448) 10.033,28.448 ; 13.208,22.606 13.208,24.003 ccw(c12.7,24.003) 12.192,24.003 ccw(c11.684,24.003) 11.176,24.003 ; 15.621,22.606 15.621,24.003 cw(c16.129,24.003) 16.637,24.003 cw(c17.145,24.003) 17.653,24.003 cw(c18.161,24.003) 18.669,24.003 ; 15.621,29.845 15.621,28.448 ccw(c16.129,28.448) 16.637,28.448 ccw(c17.145,28.448) 17.653,28.448 ; 17.653,29.845 17.653,28.448 ; 18.669,22.606 18.669,24.003 ; 20.701,22.606 20.701,24.003 ccw(c20.193,24.003) 19.685,24.003 ccw(c19.177,24.003) 18.669,24.003 ; 20.701,29.845 20.701,28.448 cw(c20.193,28.448) 19.685,28.448 cw(c19.177,28.448) 18.669,28.448 cw(c18.161,28.448) 17.653,28.448
  text "JCHGB" at 32.512,41.275 h2 r90
  text "CH-" at 44.45,38.608 h2.3
  text "V1.0c" at 26.289,37.211 h2.25 r90
  text "With" at 20.955,36.322 h2 r90
  text "C" at 48.387,36.068 h1.6
  text "4SBMS" at 22.733,35.179 h2 r90
  text "FLBM3_BAL" at 24.638,34.544 h2.25 r90
  text "DBG" at 48.133,32.131 h2.25 r90
  text "11V1" at 28.575,31.75 h2 r90
  text "G" at 49.911,30.988 h1.6
  text "250522" at 29.337,30.226 h2.25
  text "NTC" at 34.29,28.067 h2.25 r270
  text "JLCJLCJLCJLC" at 7.239,25.527 h2.25
  text "ER14.5" at 23.876,24.892 h2 r90
  text "B+" at 34.29,22.987 h2.25 r270
  text "BAL" at 5.842,21.082 h2 r90
  text "Red35" at 26.543,18.034 h1.6 r90
  text "PCB By:" at 25.019,17.653 h1.6 r90
  text "烫" at 31.623,9.398 h2
  text "屯" at 34.798,7.62 h2
  text "7V4" at 28.194,6.731 h2 r90
  text "3V7" at 21.336,4.953 h2 r90
Bottom Overlay:
  circle w0.254: c27.99,26.209 r24
  region: 3.99,26.209 ccw(c27.99,26.209) 27.99,2.209 ccw(c27.99,26.209) 51.99,26.209 ccw(c27.99,26.209) 27.99,50.209 ccw(c27.99,26.209)
Top Solder:
  lines w0.8: 8.001,19.685 8.001,16.764 8.509,16.256 ; 8.001,34.163 8.001,37.211 9.398,38.608 15.367,38.608 ; 8.255,19.685 8.255,16.51 8.89,15.875 8.89,15.113 10.16,13.843 15.367,13.843 15.875,13.335 15.875,11.176 ; 13.208,18.161 13.208,16.256 13.462,16.002 16.637,16.002 17.399,15.24 17.399,12.827 ; 13.208,32.512 13.208,36.83 13.716,37.338 15.494,37.338 ; 17.399,11.176 17.399,13.081 ; 18.288,17.526 19.177,16.637 19.177,14.097 20.447,12.827 25.019,12.827 25.273,12.573 25.273,11.684 ; 20.701,17.907 20.701,15.748 21.463,14.986 24.003,14.986
  lines w1: 23.114,18.034 23.114,18.669 23.114,23.876